# Altium PCB CLARA_Mainboard.PcbDoc
Units mil, origin at the board's own origin, x right, y up, seen from the top; angles counter-clockwise.
Board outline 1738.65 x 1689.34 mil, 2 copper layers (Top Layer, Bottom Layer); 14 components, 5 nets, 97 pads, 20 vias.
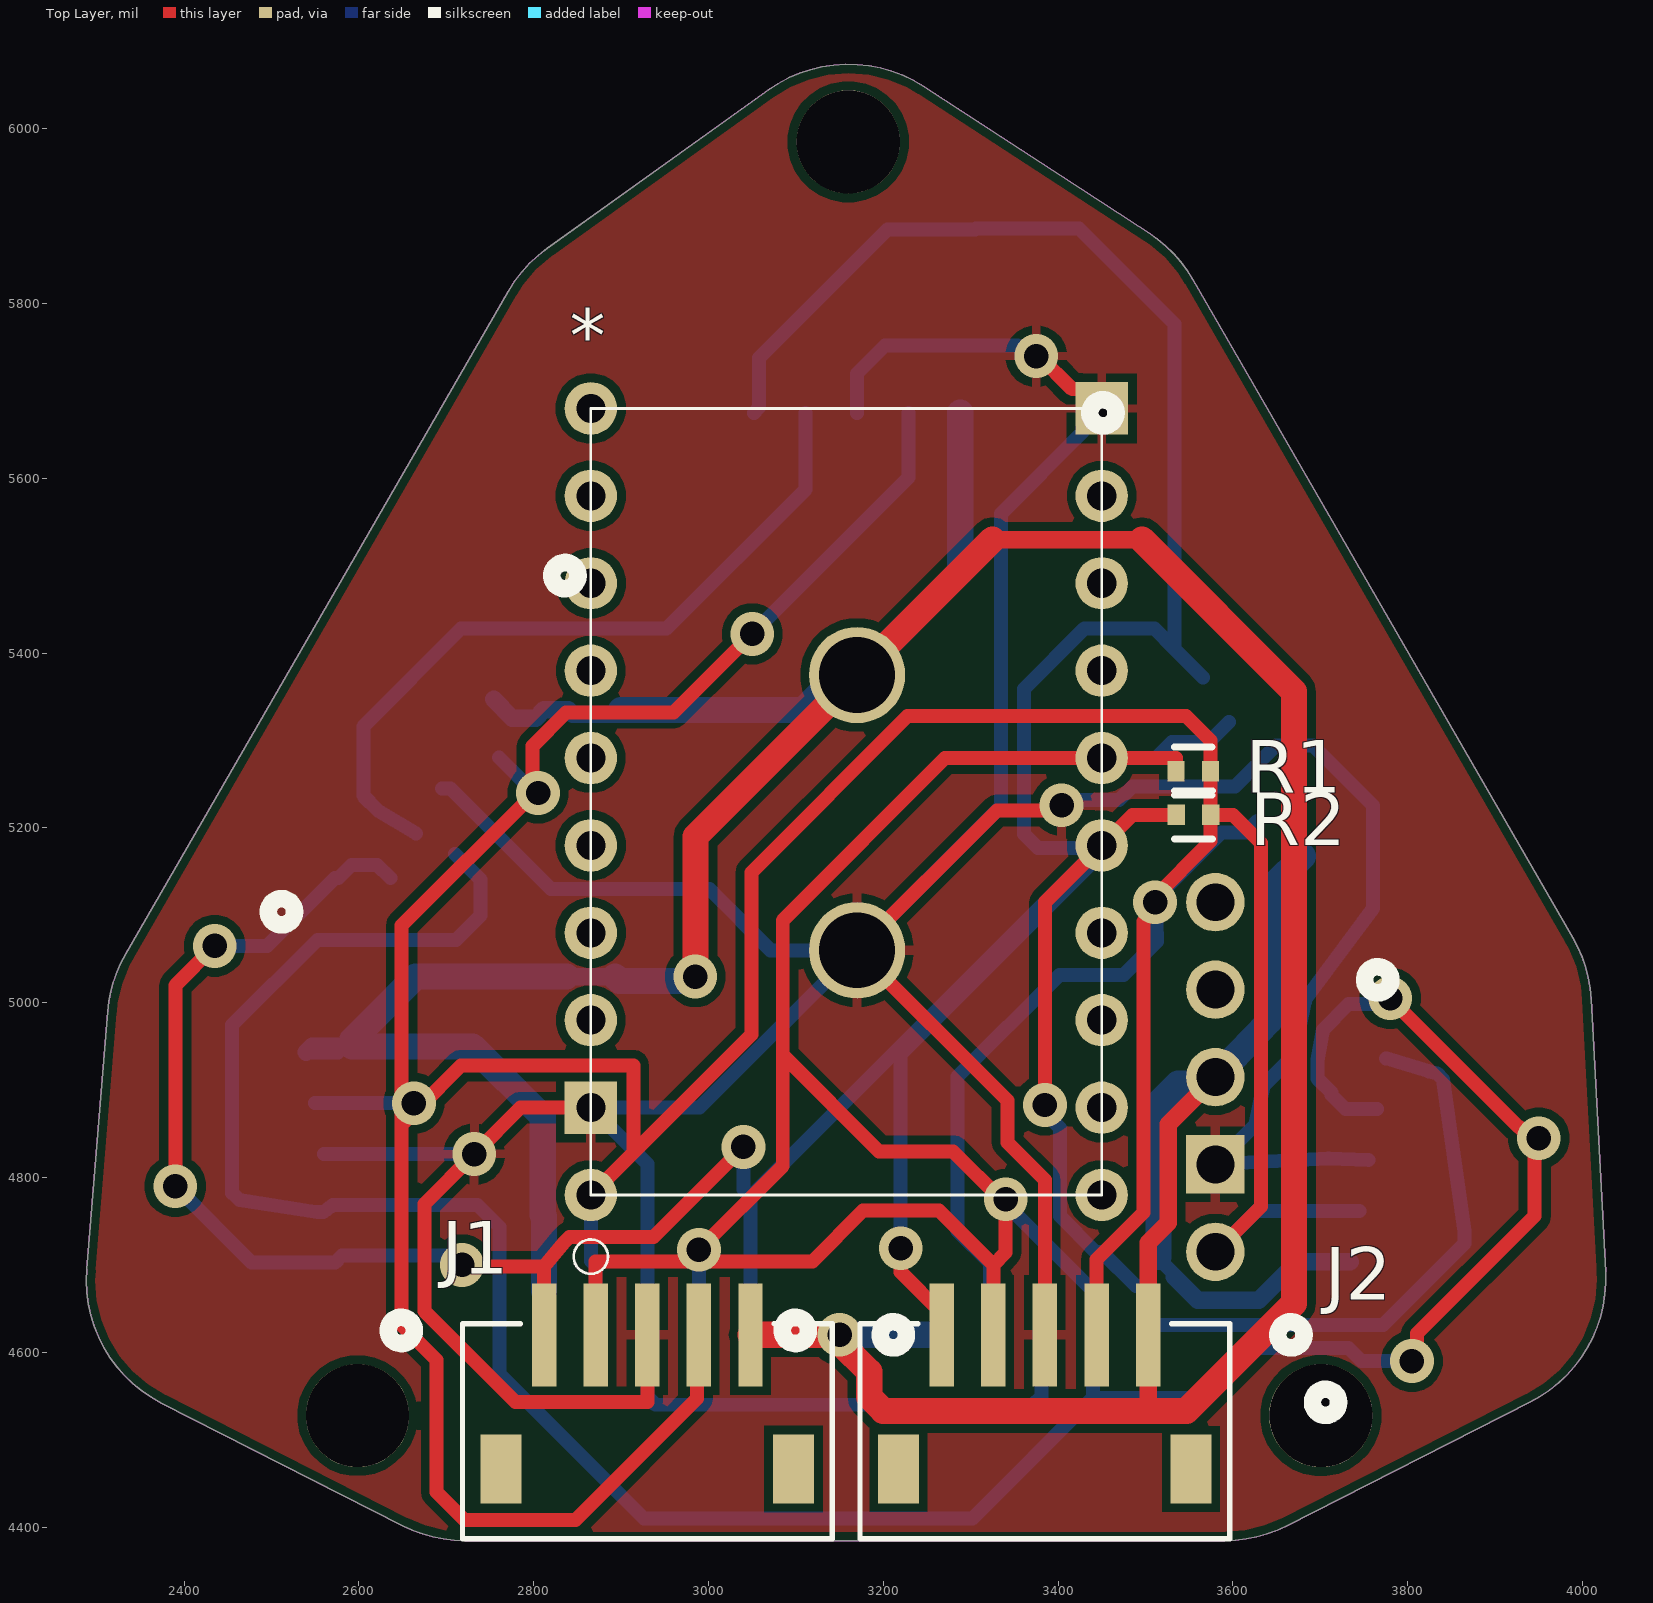
[diagram p0: Top Layer view]
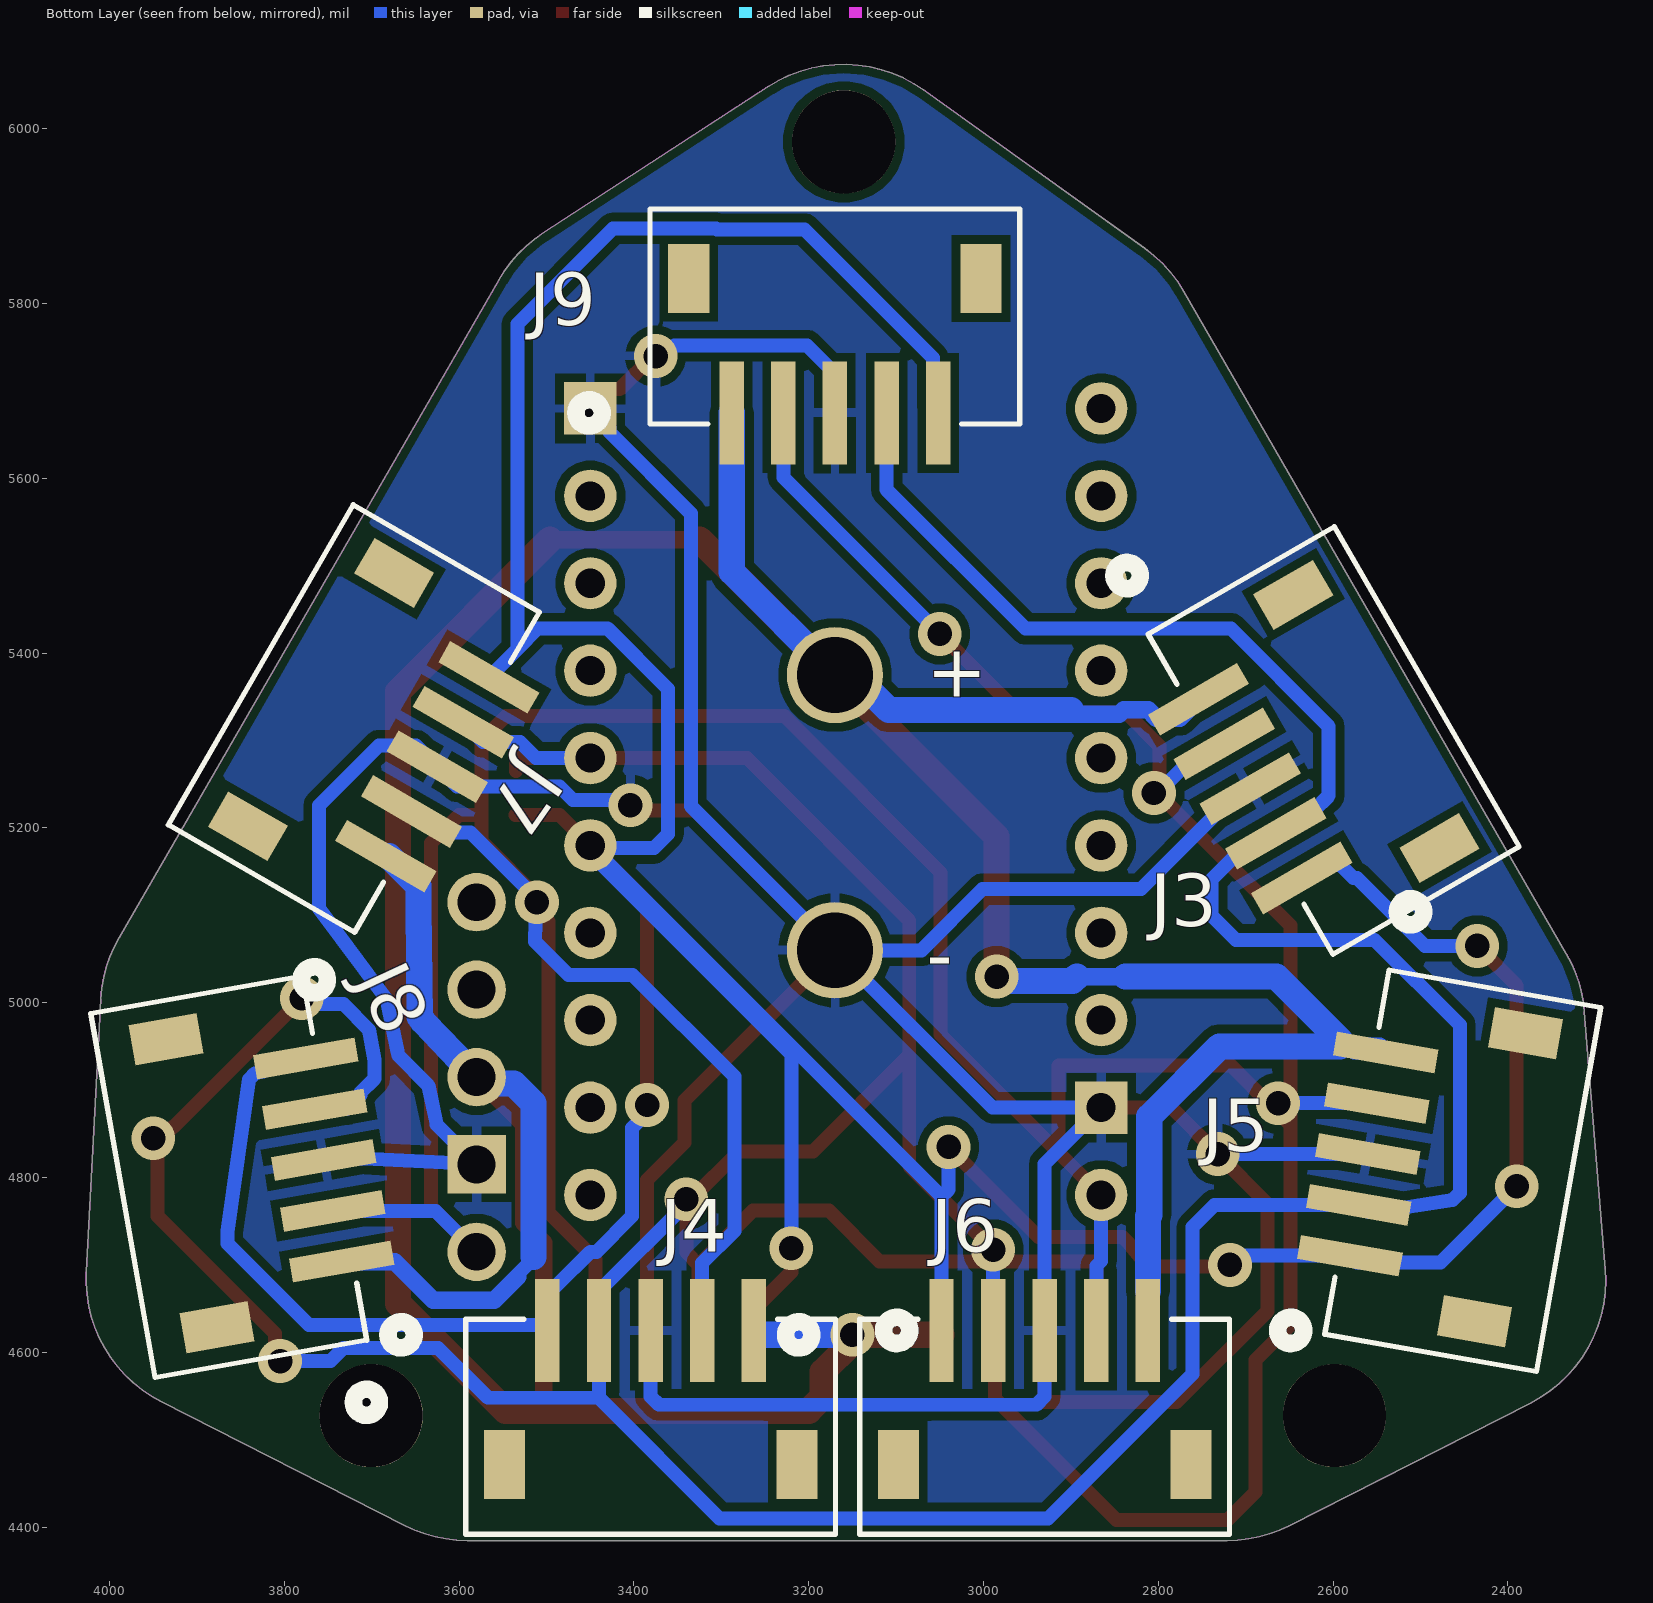
[diagram p1: Bottom Layer view, seen from below]

## Layer stack, top to bottom
Top Solder: solder mask 0.4, Solder Resist, Dk 3.5
Top Layer: signal copper 1.4
Dielectric 1: dielectric 12.6, FR-4, Dk 4.8
Bottom Layer: signal copper 1.4
Bottom Solder: solder mask 0.4, Solder Resist, Dk 3.5

## Board outline
2374.12,4541.9 2649.89,4401.62 ccw(c2721.3,4541.98) 2721.3,4384.5 3590.67,4384.5 ccw(c3590.67,4541.98) 3662.07,4401.62 3940.68,4543.35 ccw(c3869.28,4683.71) 4026.54,4692.06 4009.98,5004.2 ccw(c3852.72,4995.86) 3989.1,5074.6 3554.41,5827.5 ccw(c3418.03,5748.76) 3503.89,5880.78 3246.11,6048.42 ccw(c3160.25,5916.4) 3068.57,6044.44 2815.54,5863.27 ccw(c2907.23,5735.23) 2770.84,5813.97 2333.13,5055.83 ccw(c2469.52,4977.09) 2312.55,4989.86 2288.56,4695.04 ccw(c2445.53,4682.27)

## Design rules (kind name [scope] priority, off if disabled: settings)
Clearance [All] p1: gap=10 ignorepadtopadclearanceinfootprint=FALSE except(0: Arc-Hole Track-Hole SMDPad-Hole THPad-Hole Via-Hole Fill-Hole Poly-Hole Region-Hole Text-Hole)
HoleSize [All] p1: absolutevalues=TRUE maxlimit=100 minlimit=11.81 maxpercent=80.000 minpercent=20.000
PolygonConnect [All] p1: connectstyle=Relief reliefconductorwidth=10 reliefentries=4 polygonreliefangle="90 Angle" airgapwidth=10
RoutingVias [All] p1: holewidth=28 width=50 viastyle="Through Hole" minholewidth=11.81 minwidth=50 maxholewidth=28 maxwidth=50
SolderMaskExpansion SolderMaskExpansion_1 [All] p1 off: expansion=4 istentingtop=FALSE
SolderMaskExpansion [IsVia] p2: expansion=4 istentingtop=TRUE
Width [All] p1: maxlimit=40 minlimit=16 preferedwidth=16 minimp=50.000000 maximp=50.000000 favimp=50.000000
29 further rules are at their usual default settings.

## Components (designator, comment, footprint, x,y, rotation, side; value= is the part's Value field where it differs from the comment)
* "TinyPICO" "TinyPICO Board" 2565.35,4680 r90 top
BuckReg "Pololu D24V10F3 3.3V Buck Regulator" PCBComponent_1 3580,4715 r0 top
J1 "S5B-ZR-SM4A-TF (LF) (SN)" CONN_S5B-ZR-SM4A-TF_JST 3048.11,4620 r180 top
J2 "S5B-ZR-SM4A-TF (LF) (SN)" CONN_S5B-ZR-SM4A-TF_JST 3503.11,4620 r180 top
J3 "S5B-ZR-SM4A-TF (LF) (SN)" CONN_S5B-ZR-SM4A-TF_JST 2754.06,5347.29 r240 bottom
J4 "S5B-ZR-SM4A-TF (LF) (SN)" CONN_S5B-ZR-SM4A-TF_JST 3262.84,4625 r0 bottom
J5 "S5B-ZR-SM4A-TF (LF) (SN)" CONN_S5B-ZR-SM4A-TF_JST 2539.75,4943.16 r280 bottom
J6 "S5B-ZR-SM4A-TF (LF) (SN)" CONN_S5B-ZR-SM4A-TF_JST 2811.89,4625 r0 bottom
J7 "S5B-ZR-SM4A-TF (LF) (SN)" CONN_S5B-ZR-SM4A-TF_JST 3684.06,5167.71 r120 bottom
J8 "S5B-ZR-SM4A-TF (LF) (SN)" CONN_S5B-ZR-SM4A-TF_JST 3734.49,4703.68 r80 bottom
J9 "S5B-ZR-SM4A-TF (LF) (SN)" CONN_S5B-ZR-SM4A-TF_JST 3288.11,5675 r180 bottom
PowerWires "Power Wires" "Power Wires" 3170,5060.04 r0 top
R1 "RMCF0402JT4K70 - 4.7 kOhm - 1/16W" FP-RMCF0402-MFG 3554.68,5265 r0 top
R2 "RMCF0402JT4K70 - 4.7 kOhm - 1/16W" FP-RMCF0402-MFG 3555,5215 r0 top

## Footprints (in the part's own frame and the unit in brackets; to place one, negate y for a bottom-side part, rotate by r counter-clockwise, add the part's x,y. Pads: shape width x height; smd on the part's side, far side on the other; paste and mask are expansions set on the pad)
CONN_S5B-ZR-SM4A-TF_JST [mil]
  rect 28x118 smd paste+0 mask+0: 1(0,0) 2(59.05,0) 3(118.11,0) 4(177.17,0) 5(236.22,0)
  rect 47x79 smd: 6(-49.21,153.62) 7(285.43,153.62)
  silkscreen extent -178,-15 330,233, body extent 0,0 10,10, height 10
FP-RMCF0402-MFG [mm]
  rect 0.5x0.6 smd paste+0 mask+0: 1(-0.5,0) 2(0.5,0)
  silkscreen extent -0.55,-0.7 0.55,0.7, body extent -0.85,-0.4 0.85,0.4, height 0.25
PCBComponent_1 [mm]
  rect 1.7x1.7 hole 1.1: GND(0,2.54)
  round 1.7 hole 1.1: PG(0,10.16) SHDN(0,7.62) VIN(0,5.08) VOUT(0,0)
"Power Wires" [mm]
  round 2.8 hole 2.2: GND(0,0) VBAT(0,8)
"TinyPICO Board" [mil]
  round 60 hole 33.23: 3V3(400,-300) 4(500,-300) 5(400,-884.65) 5V(300,-300) 14(600,-300) 15(700,-300) 18(300,-884.65) 19(200,-884.65) 21(600,-884.65) 22(500,-884.65) 25(1000,-300) 26(900,-300) 27(800,-300) 32(700,-884.65) 33(800,-884.65) RST(900,-884.65)
  round 60 hole 33.24: 23(100,-884.65) BAT(100,-300)
  rect 60x60 hole 33.23: G(200,-300) G(1000,-884.65)
  Top Layer lines w10: 1000,-869.29 992.32,-876.97 ; 984.65,-884.65 989.82,-879.47 ; 992.32,-876.97 989.82,-879.47 ; 992.32,-876.97 989.82,-879.47
  silkscreen extent 10,-885 1000,-280

## Part data
BuckReg PowerWires: library part Component_1
J1 J2 J3 J4 J5 J6 J7 J8 J9: "No Description Available", Mfr_Name=JST, Copyright="Copyright (C) 2021 Ultra Librarian. All rights reserved.", Manufacturer_Part_Number="S5B-ZR-SM4A-TF (LF) (SN)", RefDes=RefDes, Type=DEV
R1 R2: library part CMP-2000-06988-2, "4.7kΩ ±5% 0.063W 0402 Thick Film Chip Resistor AEC-Q200 compliant", Case Code (Imperial)=0402, Case Code (Metric)=1005, Max Operating Temperature=155°C, Max Power Dissipation=63mW, Min Operating Temperature=-55°C, Resistance=4.7kR, Resistor Type="Thick Film", Temperature Coefficient=100ppm/°C, Tolerance=5%, Case/Package=0402, Construction=Rectangular, Contact Plating=Tin, Depth=0.5mm, Features="Automotive AEC-Q200", Height=0.016inch, Lead Free="Lead Free", Length=0.039inch, Military Standard=Not, Mount="Surface Mount", Number of Terminations=2, Packaging="Tape and Reel", Power Rating=63mW, Radiation Hardening=No, RoHS Compliant=Yes, Series=RMCF, Width=0.02inch

## Free pads (board coordinates)
  round 118.11 hole 118.11 unplated: 4(2598.43,4527.56) 4(3160,5985) 4(3700.79,4527.56)

## Via types
v1: diameter 50, hole 28, Top Layer to Bottom Layer, tented both sides, 20 vias

## Nets (pads, with @x,y where several pads share a name; then routed paths per layer and width w, separated by ;. In a path a pad name is that pad's centre, name@x,y a point inside that pad or via, vN(x,y) a via of type N, cw(c..) or ccw(c..) an arc to the next point about the centre after c; other vN are vias at no path point)
GND: *.G BuckReg.GND J1.3 J2.3 J3.3 J4.3 J5.3 J6.3 J7.3 J8.3 J9.3 PowerWires.GND | length 5754.7
  Top Layer w16: *.G@2865.35,4880 2785.16,4880 v1(2732,4826.84) 2675,4769.84 2675,4647 2779,4543 2930,4543 J1.3 ; v1(3375,5740) 3378.25,5740 3416.25,5702 3428,5702 3434.65,5695.35 *.G@3434.65,5680 ; J2.3 3385,4797 3342,4840 3342,4888.04 PowerWires.GND 3329.96,5220 3398.08,5220 v1(3404,5225.92) ; *.G@3450,5664.65 3442.32,5672.32 *.G@3434.65,5680 ; *.G@3450,5680 3442.32,5680 *.G@3434.65,5680
  Bottom Layer w16: J5.3 v1(2732,4826.84) ; J3.3 2705,5245 2820,5130 3001.04,5130 3071,5060.04 PowerWires.GND ; J9.3 3170,5720 3202,5752 3353.8,5752 3365.8,5740 v1(3375,5740) ; J4.3 3380.95,4549.37 3371.57,4540 2939.37,4540 2930,4549.37 2930,4815.35 2865.35,4880 2989.96,4880 PowerWires.GND ; v1(3404,5225.92) 3410.08,5232 3469.88,5232 3485.38,5247.5 3602.5,5247.5 3649.18,5294.18 3691.84,5294.18 3760.15,5225.86 3760.15,5107.59 3683.11,5004.02 3682.39,5000.57 3670.58,4944.26 3669.6,4939.6 3635,4905 3625.71,4860.71 BuckReg.GND 3605.46,4816.39 3605.89,4816.39 3709.36,4821.95 J8.3 ; *.G@3450,5680 3428,5658 3428,5653 3335,5560 3335,5225.04 PowerWires.GND
SCL: *.22 J1.5 J2.5 J3.5 J4.5 J5.5 J6.5 J7.5 J8.5 J9.5 R2.1 | length 5723.9
  Top Layer w16: v1(2390,4790) 2390,5020 v1(2435,5065) ; v1(2718,4700) 2720,4698 2811.89,4698 ; J1.5 2811.89,4698 ; v1(3040,4835) 2937,4732 2841.01,4732 2835.2,4726.19 2811.89,4698 ; v1(3220,4719) 3220,4691.89 3266.89,4645 J2.5 ; v1(3385,4883) 3385,5115 *.22 3485,5215 R2.1
  Bottom Layer w16: v1(2390,4790) 2477.29,4702.71 2572.95,4702.71 J5.5 2707.47,4710.53 v1(2718,4700) ; v1(2435,5065) 2495,5065 2572.71,5142.71 2576.48,5142.71 2591.51,5157.74 2620.91,5157.74 J3.5 ; v1(3040,4835) 3040.22,4834.78 3040.22,4786 3048.11,4778.11 ; J6.5 3048.11,4778.11 ; J9.5 3057.89,5681 3057.89,5737.89 3205,5885 3305.24,5885 3306.37,5886.12 3423.88,5886.12 3533.34,5776.66 3533.34,5404.89 ; v1(3220,4719) 3220,4941.37 3406.63,5128 3450,5171.37 *.22 3447,5177 3377.19,5177 3361,5193.19 3361,5359 3430,5428 3510.23,5428 3533.34,5404.89 ; v1(3385,4883) 3385,4873.8 3402,4856.8 3402,4756.06 3443.06,4715 3450,4715 3489,4676 J4.5@3505,4676 ; *.22@3445.68,5175.68 3402.32,5132.32 3215.68,4945.68 3048.11,4778.11 ; J4.5 3499.06,4631 3772,4631 3865.31,4724.31 3865.31,4737.57 3865.15,4738.69 3840.52,4912.15 3833.89,4918.79 3824.69,4921.55 J8.5 ; J7.5 3533.34,5404.89
SDA: *.21 J1.4 J2.4 J3.4 J4.4 J5.4 J6.4 J7.4 J8.4 J9.4 R1.1 | length 6493.8
  Top Layer w16: J1.4 2870.94,4704 3118.84,4704 3176.84,4762 3263.95,4762 3325.95,4700 ; v1(2989.05,4717.38) 3085,4813.32 3085,4940 ; J2.4 3325.95,4700 ; R1.1 3535,5280 *.21 3270.82,5280 3085,5094.18 3085,4940 ; v1(3780,5005) 3926.35,4858.65 3927.15,4858.65 3940.8,4845 v1(3950,4845) ; v1(3805,4590) 3810.97,4595.97 3810.97,4621.33 3945.4,4755.76 v1@3945.4,4840.4 ; 3085,4940 3195,4830 3280,4830 3335,4775 v1(3340,4775) 3340,4714.05 3325.95,4700
  Bottom Layer w16: J3.4 2621.74,5220.11 2605,5236.85 2605,5316 2717,5428 2951.94,5428 3110.94,5587 J9.4 ; J3.4@2710,5170 2739,5141 2739,5100 2711,5072 2552.43,5072 2455,4974.57 2455,4782.56 2459.69,4777.88 2463.38,4774.18 2552.68,4760.36 2559.14,4760.36 2563.36,4763.45 2568.24,4767.02 J5.4 2735.79,4768.68 2761,4743.48 2761,4575 2926,4410 3302,4410 3440,4548 ; J6.4 v1(2989.05,4717.38) ; v1(3340,4775) 3340,4770 3440,4670 3440,4548 ; *.21 3512,5280 3530.48,5298.48 3572.81,5298.48 J7.4 ; J8.4 3728.93,4878.16 3712.9,4894.19 3712.9,4897.1 3696.97,4913.03 3696.97,4934.35 3703.09,4969.06 3732.53,4998.49 3773.49,4998.49 v1(3780,5005) ; v1(3805,4590) 3747.32,4590 3732.32,4605 3624,4605 3567,4548 3440,4548
VBAT: BuckReg.VIN J1.1 J2.1 J3.1 J4.1 J5.1 J6.1 J7.1 J8.1 J9.1 PowerWires.VBAT | length 5637.7
  Top Layer w16: 3526,4859 3526,4861
  Top Layer w20: v1@3150,4611.88 v1(3150,4620) ; 3325,5530 3496,5530 ; 3503.11,4533 J2.1 3503.11,4725.63 3526,4748.52 3526,4859 ; 3526,4861 BuckReg.VIN
  Top Layer w30: v1(2985,5030) 2985,5190 3325,5530 ; J1.1 v1(3150,4620) ; v1@3150,4611.88 3184.02,4577.86 3184.02,4548.98 3200,4533 3503.11,4533 3547,4533 3670,4656 3670,5356 3496,5530
  Bottom Layer w16: J5.1@2546.59,4943.16 2576.07,4943.16 J5.1@2582.91,4950 ; J4.1@3257.84,4620 J4.1 ; 3515,4709 3515,4707.51 3532.9,4689.61 3532.9,4686.49 ; 3644.77,4981.95 3645.2,4984.04 ; J7.1@3680.2,5167.71 J7.1 ; J8.1@3734.26,4703.46 J8.1
  Bottom Layer w20: J5.1 2546.59,4950 J5.1@2582.91,4950 ; J3.1 2775.57,5325.77 2802.15,5325.77 2811.38,5335 2839.64,5335 2844.64,5330 2895,5330 2900,5335 ; J6.1 J6.1@2811.89,4670 ; 2837.57,5030 2844.64,5030 2893.14,5030 ; v1@2975.28,5025 2980.28,5030 v1(2985,5030) ; PowerWires.VBAT@3148.17,5375 PowerWires.VBAT ; 3532.9,4686.49 3559.8,4659.59 3629.59,4659.59 3673.46,4703.46 J8.1@3734.26,4703.46
  Bottom Layer w30: J5.1@2592.1,4950 2730,4950 2810.35,4869.65 2810.35,4757.22 2811.89,4755.68 J6.1@2811.89,4670 ; J5.1@2592.19,4957.19 2665,5030 2837.57,5030 ; 2893.14,5030 2898.14,5025 v1@2975.28,5025 ; 2900,5335 3108.29,5335 3148.17,5374.88 PowerWires.VBAT@3148.17,5375 ; v1(3150,4620) J4.1@3257.84,4620 ; PowerWires.VBAT 3288.11,5493.11 J9.1 ; 3515,4709 3515,4885 3537.62,4907.62 3572.62,4907.62 BuckReg.VIN 3590.2,4925.2 3640.36,4977.37 3645.2,4984.04 3646.57,5109.24 3646.57,5134.09 J7.1@3680.2,5167.71
VCC: *.BAT BuckReg.VOUT J1.2 J2.2 J3.2 J4.2 J5.2 J6.2 J7.2 J8.2 J9.2 R1.2 R2.2 | length 6089.6
  Top Layer w16: v1@2649,4897.4 2649,4885 2649,4860 ; 2649,5086.73 2649,4899 v1(2663,4885) ; 2649,5088.33 2800.67,5240 v1(2805,5240) 2798.5,5246.5 2798.5,5293.5 2837,5332 2960,5332 v1(3050,5422) ; *.BAT 2914,4828.65 ; J1.2 2987.06,4618 2987.06,4547.06 2848,4408 2721,4408 2689,4440 2689,4591 2649,4631 2649,4860 ; J2.2 3444.06,4706.17 3498,4760.12 3498,5092.8 3511,5105.8 v1(3511,5115) ; v1@3507.84,5118.16 3574.69,5185 R2.2 ; BuckReg.VOUT 3632,4767 3632,5183 3600,5215 R2.2 ; 2649,4860 2668.5,4879.5 2717,4928 2914,4928 2914,4828.65 ; 2914,4828.65 3049,4963.65 3049,5149 3228,5328 3546.37,5328 3574.37,5300 R1.2 3574.37,5239.32 3574.69,5239 R2.2
  Bottom Layer w16: J5.2 v1(2663,4885) ; J3.2@2760.54,5280.54 2801.07,5240 v1(2805,5240) ; *.BAT 2865.35,4704.59 2870.94,4699 J6.2 ; v1(3050,5422) 3229.05,5601.05 J9.2 ; J4.2 3321.89,4702 3285,4738.89 3285,4915.55 3401.45,5032 3475,5032 3513,5070 v1@3512.25,5115 ; v1(3511,5115) v1@3512.25,5115 ; BuckReg.VOUT 3626.84,4761.84 J8.2 ; J7.2@3628.22,5208.22 3615,5195 3587.22,5195 3512.25,5120.03 v1@3512.25,5115
pads on no net: *.3V3 *.4 *.5 *.5V *.14 *.15 *.18 *.19 *.23 *.25 *.26 *.27 *.32 *.33 *.RST BuckReg.PG BuckReg.SHDN J1.6 J1.7 J2.6 J2.7 J3.6 J3.7 J4.6 J4.7 J5.6 J5.7 J6.6 J6.7 J7.6 J7.7 J8.6 J8.7 J9.6 J9.7

## Polygon pours and split planes (outlines as drawn)
GND on Top Layer "GND_L01_P000" (solid, remove dead copper, pour order 0): 1825,6205 4770,6205 4735,6170 4735,4210 2005,4210 1910,4305
GND on Bottom Layer "GND_L02_P002" (solid, remove dead copper, pour order 2): 1700,6240 1775,6165 4965,6165 4965,4290 4740,4065 4675,4130 1805,4130

## Keep-outs
Keep-Out Layer:
  the board outline again, w0.5

## Silkscreen, mask and mechanical layers (free items; w line width, h text height)
Mechanical 1:
  lines w0.5: 2640.3,4477.58 ccw(c2657.34,4487.43) 2674.39,4497.27 ; 3638.46,4498.75 ccw(c3655.5,4488.91) 3672.55,4479.07

## Text inside footprints (layer, text, board x,y; h text height)
J1: Mechanical 7 "Default Padstyle: RX28Y118D0T" at 3292.5,4839 h50 r180; Mechanical 7 "1st Mtg Padstyle: RX79Y47D0T" at 3280,4914 h50 r180; Mechanical 7 "2nd Mtg Padstyle: EX70Y70D70P" at 3292.5,4989 h50 r180; Mechanical 7 "3rd Mtg Padstyle: EX70Y70D70P" at 3292.5,5064 h50 r180; Mechanical 7 "Left Mtg Padstyle: EX60Y60D30P" at 3305,5139 h50 r180; Mechanical 7 "Right Mtg Padstyle: EX60Y60D30P" at 3317.5,5214 h50 r180; Mechanical 7 "Alt Padstyle 1: OX60Y90D30P" at 3267.5,5289 h50 r180; Mechanical 7 "Alt Padstyle 2: OX90Y60D30P" at 3267.5,5364 h50 r180; Mechanical 7 "0.059in/1.5mm" at 3099.83,4286.69 h25 r180; Mechanical 7 "0.335in/8.5mm" at 3011.25,4061.69 h25 r180; Mechanical 7 "0.413in/10.49mm" at 3023.75,3961.69 h25 r180; Mechanical 7 "0in/0mm" at 2603.5,4632.5 h25 r180; Mechanical 7 "0.154in/3.902mm" at 3429.32,4555.69 h25 r180; Mechanical 7 "0.228in/5.799mm" at 3754.32,4518.35 h25 r180; Mechanical 7 "0.236in/5.994mm" at 3704.32,4522.19 h25 r180
J2: Mechanical 7 "0.236in/5.994mm" at 4159.32,4522.19 h25 r180; Mechanical 7 "0.228in/5.799mm" at 4209.32,4518.35 h25 r180; Mechanical 7 "0.154in/3.902mm" at 3884.32,4555.69 h25 r180; Mechanical 7 "0in/0mm" at 3058.5,4632.5 h25 r180; Mechanical 7 "0.413in/10.49mm" at 3478.75,3961.69 h25 r180; Mechanical 7 "0.335in/8.5mm" at 3466.25,4061.69 h25 r180; Mechanical 7 "0.059in/1.5mm" at 3554.83,4286.69 h25 r180; Mechanical 7 "Alt Padstyle 2: OX90Y60D30P" at 3722.5,5364 h50 r180; Mechanical 7 "Alt Padstyle 1: OX60Y90D30P" at 3722.5,5289 h50 r180; Mechanical 7 "3rd Mtg Padstyle: EX70Y70D70P" at 3747.5,5064 h50 r180; Mechanical 7 "2nd Mtg Padstyle: EX70Y70D70P" at 3747.5,4989 h50 r180; Mechanical 7 "1st Mtg Padstyle: RX79Y47D0T" at 3735,4914 h50 r180; Mechanical 7 "Default Padstyle: RX28Y118D0T" at 3747.5,4839 h50 r180
J3: Mechanical 7 "Default Padstyle: RX28Y118D0T" at 3065.91,5449.43 h50 r60; Mechanical 7 "2nd Mtg Padstyle: EX70Y70D70P" at 3195.81,5374.43 h50 r60; Mechanical 7 "3rd Mtg Padstyle: EX70Y70D70P" at 3260.77,5336.93 h50 r60; Mechanical 7 "Left Mtg Padstyle: EX60Y60D30P" at 3331.97,5310.26 h50 r60; Mechanical 7 "Right Mtg Padstyle: EX60Y60D30P" at 3403.17,5283.58 h50 r60; Mechanical 7 "Alt Padstyle 1: OX60Y90D30P" at 3443.12,5202.78 h50 r60; Mechanical 7 "Alt Padstyle 2: OX90Y60D30P" at 3508.07,5165.28 h50 r60; Mechanical 7 "0.059in/1.5mm" at 2491.26,5558.73 h25 r60; Mechanical 7 "0.335in/8.5mm" at 2252.12,5594.52 h25 r60; Mechanical 7 "0.413in/10.49mm" at 2171.77,5655.34 h25 r60; Mechanical 7 "0in/0mm" at 2542.58,4955.99 h25 r60; Mechanical 7 "0.154in/3.902mm" at 2888.97,5709.58 h25 r60; Mechanical 7 "0.228in/5.799mm" at 3019.13,6009.71 h25 r60; Mechanical 7 "0.236in/5.994mm" at 2997.46,5964.49 h25 r60
J4: Mechanical 7 "0.236in/5.994mm" at 2606.62,4527.19 h25 r180; Mechanical 7 "0.228in/5.799mm" at 2556.62,4523.35 h25 r180; Mechanical 7 "0.154in/3.902mm" at 2881.62,4560.69 h25 r180; Mechanical 7 "0in/0mm" at 3707.45,4637.5 h25 r180; Mechanical 7 "0.413in/10.49mm" at 3287.2,3966.69 h25 r180; Mechanical 7 "0.335in/8.5mm" at 3299.7,4066.69 h25 r180; Mechanical 7 "0.059in/1.5mm" at 3211.11,4291.69 h25 r180; Mechanical 7 "Alt Padstyle 2: OX90Y60D30P" at 3043.45,5369 h50 r180; Mechanical 7 "Alt Padstyle 1: OX60Y90D30P" at 3043.45,5294 h50 r180; Mechanical 7 "Right Mtg Padstyle: EX60Y60D30P" at 2993.45,5219 h50 r180; Mechanical 7 "Left Mtg Padstyle: EX60Y60D30P" at 3005.95,5144 h50 r180; Mechanical 7 "2nd Mtg Padstyle: EX70Y70D70P" at 3018.45,4994 h50 r180; Mechanical 7 "Default Padstyle: RX28Y118D0T" at 3018.45,4844 h50 r180
J5: Mechanical 7 "2nd Mtg Padstyle: EX70Y70D70P" at 2860.7,5247.91 h50 r100; Mechanical 7 "3rd Mtg Padstyle: EX70Y70D70P" at 2934.56,5260.93 h50 r100; Mechanical 7 "Left Mtg Padstyle: EX60Y60D30P" at 3006.25,5286.27 h50 r100; Mechanical 7 "Right Mtg Padstyle: EX60Y60D30P" at 3077.94,5311.6 h50 r100; Mechanical 7 "Alt Padstyle 1: OX60Y90D30P" at 3160.49,5275.39 h50 r100; Mechanical 7 "Alt Padstyle 2: OX90Y60D30P" at 3234.35,5288.41 h50 r100; Mechanical 7 "0.059in/1.5mm" at 2202.52,4936.22 h25 r100; Mechanical 7 "0.335in/8.5mm" at 1996.32,4809.91 h25 r100; Mechanical 7 "0.413in/10.49mm" at 1895.67,4804.85 h25 r100; Mechanical 7 "0in/0mm" at 2629.26,4507.47 h25 r100; Mechanical 7 "0.154in/3.902mm" at 2410.22,5307.41 h25 r100; Mechanical 7 "0.228in/5.799mm" at 2317,5620.99 h25 r100; Mechanical 7 "0.236in/5.994mm" at 2329.47,5572.42 h25 r100
J6: Mechanical 7 "0.236in/5.994mm" at 2155.68,4527.19 h25 r180; Mechanical 7 "0.228in/5.799mm" at 2105.68,4523.35 h25 r180; Mechanical 7 "0.154in/3.902mm" at 2430.68,4560.69 h25 r180; Mechanical 7 "0in/0mm" at 3256.5,4637.5 h25 r180; Mechanical 7 "0.413in/10.49mm" at 2836.25,3966.69 h25 r180; Mechanical 7 "0.335in/8.5mm" at 2848.75,4066.69 h25 r180; Mechanical 7 "0.059in/1.5mm" at 2760.17,4291.69 h25 r180; Mechanical 7 "Alt Padstyle 2: OX90Y60D30P" at 2592.5,5369 h50 r180; Mechanical 7 "Alt Padstyle 1: OX60Y90D30P" at 2592.5,5294 h50 r180; Mechanical 7 "Left Mtg Padstyle: EX60Y60D30P" at 2555,5144 h50 r180; Mechanical 7 "3rd Mtg Padstyle: EX70Y70D70P" at 2567.5,5069 h50 r180; Mechanical 7 "2nd Mtg Padstyle: EX70Y70D70P" at 2567.5,4994 h50 r180; Mechanical 7 "1st Mtg Padstyle: RX79Y47D0T" at 2580,4919 h50 r180; Mechanical 7 "Default Padstyle: RX28Y118D0T" at 2567.5,4844 h50 r180
J7: Mechanical 7 "Default Padstyle: RX28Y118D0T" at 3616.59,4846.57 h50 r300; Mechanical 7 "1st Mtg Padstyle: RX79Y47D0T" at 3545.39,4819.89 h50 r300; Mechanical 7 "2nd Mtg Padstyle: EX70Y70D70P" at 3486.69,4771.57 h50 r300; Mechanical 7 "3rd Mtg Padstyle: EX70Y70D70P" at 3421.73,4734.07 h50 r300; Mechanical 7 "Right Mtg Padstyle: EX60Y60D30P" at 3304.33,4637.42 h50 r300; Mechanical 7 "Alt Padstyle 1: OX60Y90D30P" at 3214.38,4643.22 h50 r300; Mechanical 7 "0.059in/1.5mm" at 3998.57,5289.57 h25 r300; Mechanical 7 "0.335in/8.5mm" at 4149.13,5478.79 h25 r300; Mechanical 7 "0.413in/10.49mm" at 4241.99,5517.96 h25 r300; Mechanical 7 "0in/0mm" at 3450.92,5546.51 h25 r300; Mechanical 7 "0.154in/3.902mm" at 3930.36,4869.73 h25 r300; Mechanical 7 "0.228in/5.799mm" at 4125.2,4606.94 h25 r300; Mechanical 7 "0.236in/5.994mm" at 4096.86,4648.32 h25 r300
J8: Mechanical 7 "Default Padstyle: RX28Y118D0T" at 3476.38,4501.04 h50 r260; Mechanical 7 "2nd Mtg Padstyle: EX70Y70D70P" at 3328.66,4527.08 h50 r260; Mechanical 7 "3rd Mtg Padstyle: EX70Y70D70P" at 3254.8,4540.11 h50 r260; Mechanical 7 "Left Mtg Padstyle: EX60Y60D30P" at 3178.77,4540.82 h50 r260; Mechanical 7 "Right Mtg Padstyle: EX60Y60D30P" at 3102.73,4541.53 h50 r260; Mechanical 7 "Alt Padstyle 1: OX60Y90D30P" at 3037.56,4603.8 h50 r260; Mechanical 7 "Alt Padstyle 2: OX90Y60D30P" at 2963.7,4616.82 h50 r260; Mechanical 7 "0.059in/1.5mm" at 4053.75,4594.87 h25 r260; Mechanical 7 "0.335in/8.5mm" at 4290.72,4643.04 h25 r260; Mechanical 7 "0.413in/10.49mm" at 4387.03,4613.36 h25 r260; Mechanical 7 "0in/0mm" at 3799.39,5143.71 h25 r260; Mechanical 7 "0.154in/3.902mm" at 3731.63,4317.1 h25 r260; Mechanical 7 "0.228in/5.799mm" at 3711.97,3990.55 h25 r260; Mechanical 7 "0.236in/5.994mm" at 3716.86,4040.46 h25 r260
J9: Mechanical 7 "0.236in/5.994mm" at 3944.32,5772.81 h25; Mechanical 7 "0.228in/5.799mm" at 3994.32,5776.65 h25; Mechanical 7 "0.154in/3.902mm" at 3669.32,5739.31 h25; Mechanical 7 "0.413in/10.49mm" at 3263.75,6333.31 h25; Mechanical 7 "0.335in/8.5mm" at 3251.25,6233.31 h25; Mechanical 7 "0.059in/1.5mm" at 3339.83,6008.31 h25; Mechanical 7 "Alt Padstyle 2: OX90Y60D30P" at 3507.5,4931 h50; Mechanical 7 "Alt Padstyle 1: OX60Y90D30P" at 3507.5,5006 h50; Mechanical 7 "Right Mtg Padstyle: EX60Y60D30P" at 3557.5,5081 h50; Mechanical 7 "Left Mtg Padstyle: EX60Y60D30P" at 3545,5156 h50; Mechanical 7 "3rd Mtg Padstyle: EX70Y70D70P" at 3532.5,5231 h50; Mechanical 7 "2nd Mtg Padstyle: EX70Y70D70P" at 3532.5,5306 h50; Mechanical 7 "1st Mtg Padstyle: RX79Y47D0T" at 3520,5381 h50; Mechanical 7 "Default Padstyle: RX28Y118D0T" at 3532.5,5456 h50
PowerWires: Bottom Overlay "-" at 3065,5025.01 h60; Bottom Overlay "+" at 3065,5350 h60